# EAGLE board ESP-12E Dev Board_with_level_shifter (EAGLE 9.4.2)
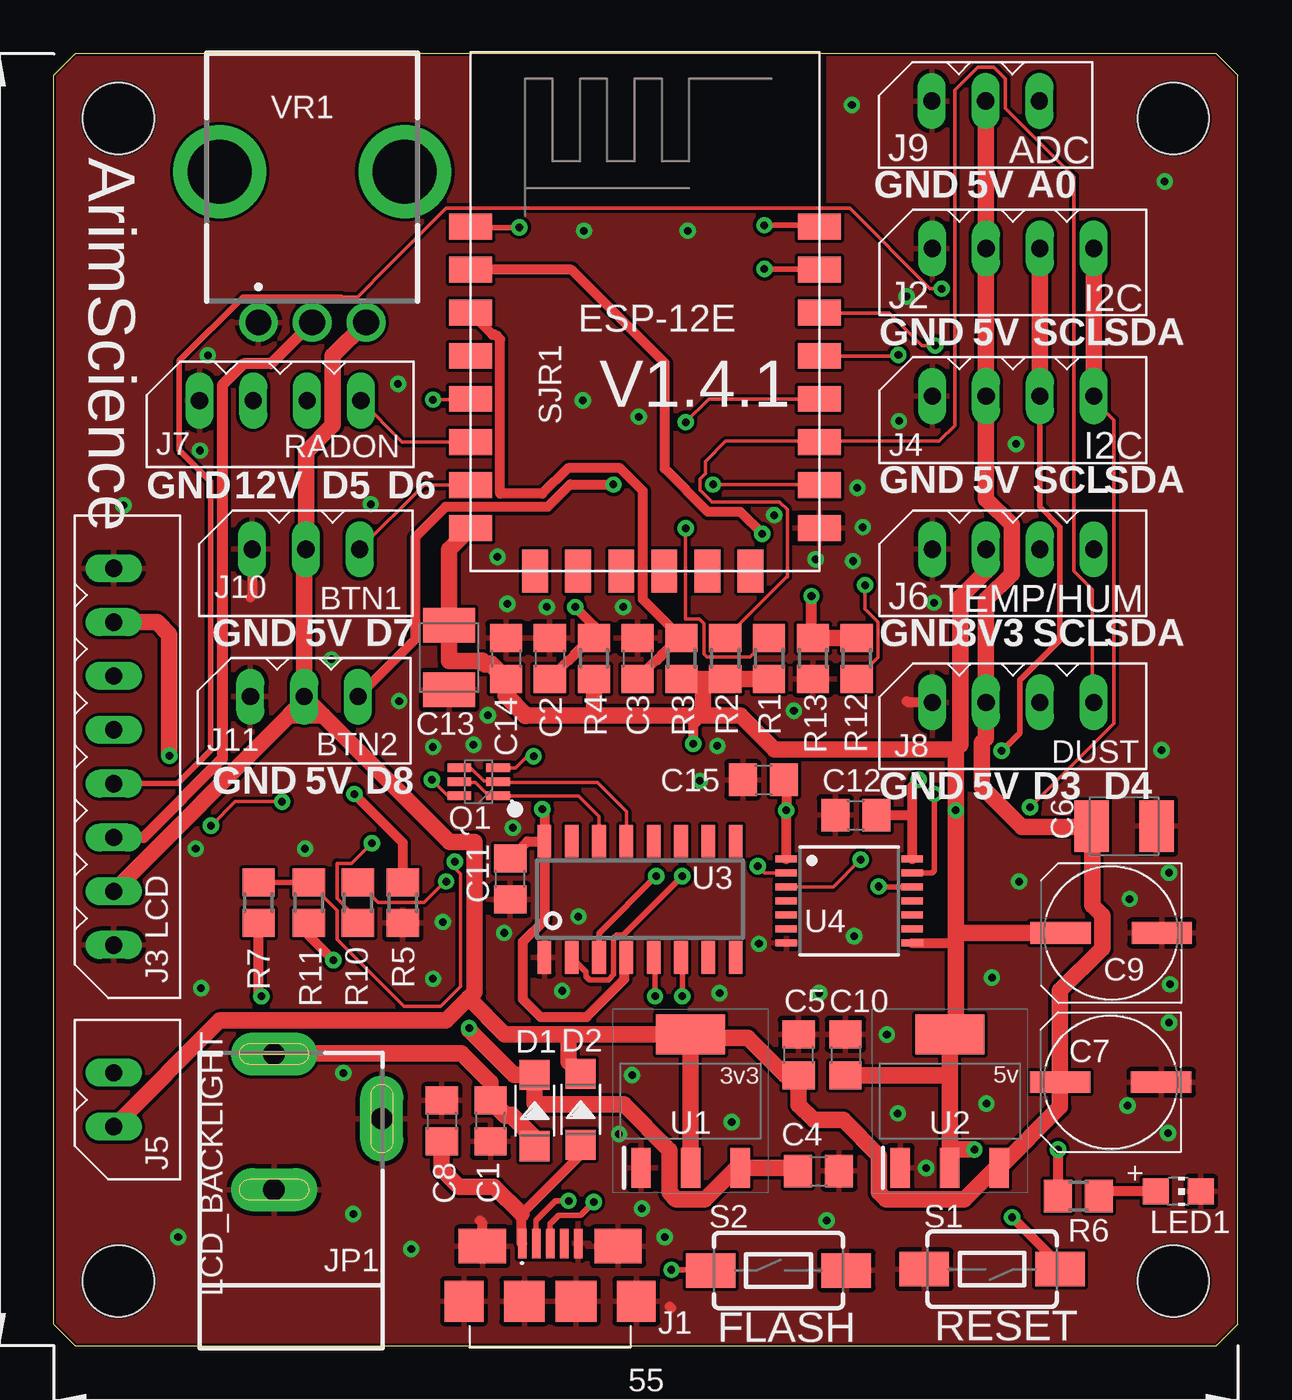
[diagram p0: board, top side]
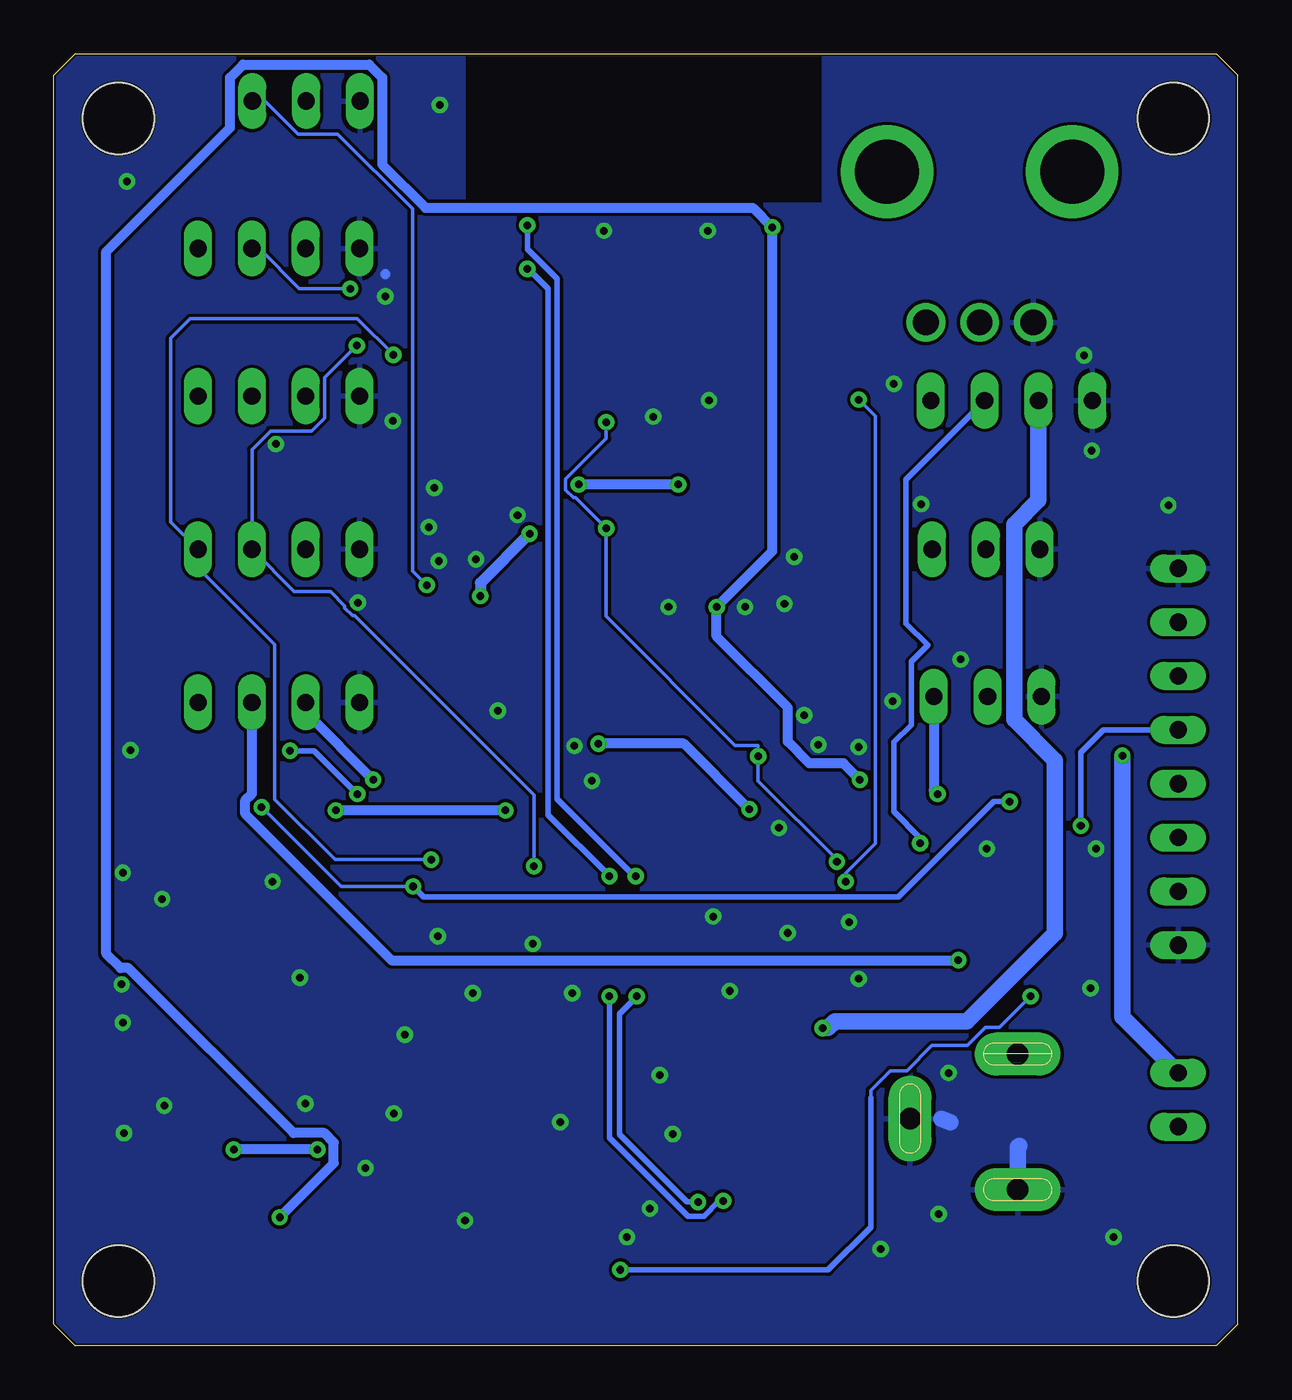
[diagram p1: board, bottom side, seen from below]

Size 55 x 60 mm. Coordinates in mm from the lower left corner, seen from the top.
Outline: 0,1 0,59 1,60 54,60 55,59 55,1 54,0 1,0 0,1
Copper layers (1*16): Top 0.035mm / dielectric 1.5mm / Bottom 0.035mm
Design rules "default *": minimum track width 6mil, minimum drill 0.35mm, track to track 6mil, track to pad 6mil, pad to pad 6mil, via to via 6mil, smd to smd 6mil, copper to edge 4mil, drill to drill 6mil, minimum pad ring 10mil, minimum via ring 8mil, stop-mask expansion 4mil, vias tented up to drill 15mil, thermal gap 8mil
Net classes: 1 power: width 0.457 mm
Holes 3.3 mm at 3,57 52,57 52,3 3,3

## Footprints (pad centres in the part's own frame; a part is rotated, then mirrored left to right if it is on the bottom)
C0805 = smd 1.3 x 1.5: 1 -0.95,0; 2 0.95,0
SMC_B = smd 1.6 x 2.4: + -1.5,0; - 1.5,0
UD-6,3X7,7_NICHICON = smd 2.8 x 1: + 2.35,0; - -2.35,0
SOD-123 = smd 1.397 x 1.397: + -1.651,0; - 1.651,0
ZX62B5PA33 = smd 0.4 x 1.35: D+ 0,1.95; D- -0.65,1.95; GND 1.3,1.95; ID 0.65,1.95; VCC -1.3,1.95 | smd 2.2 x 1.6: SHIELD_1 -3.15,1.825; SHIELD_6 3.15,1.825 | smd 1.8 x 1.9: SHIELD_2 -4,-0.725; SHIELD_5 4,-0.725 | smd 1.9 x 1.9: SHIELD_3 -1.2,-0.725; SHIELD_4 1.2,-0.725
5267-4 = drill 0.8 long: P$1 0,0; P$2 2.5,0; P$3 5,0; P$4 7.5,0
5267-8 = drill 0.8 long: P$1 0,0; P$2 2.5,0; P$3 5,0; P$4 7.5,0; P$5 10,0; P$6 12.5,0; P$7 15,0; P$8 17.5,0
5267-2 = drill 0.8 long: P$1 0,0; P$2 2.5,0
5267-3 = drill 0.8 long: P$1 0,0; P$2 2.5,0; P$3 5,0
POWER_JACK_SLOT = drill 1 pad 2 long: GND@1 2.5,1.39; GND@2 -2.5,-1.91; PWR 2.5,-4.91
CHIP-LED0805 = smd 1.2 x 1.2: A 0,-1.05; C 0,1.05
SOT65P210X100-6N = smd 1.1 x 0.4: 1 -0.9,0.65; 2 -0.9,0; 3 -0.9,-0.65; 4 0.9,-0.65; 5 0.9,0; 6 0.9,0.65
R0805 = smd 1.3 x 1.5: 1 -0.95,0; 2 0.95,0
TACTILE_SWITCH_SMD_6.0X3.5MM = smd 2.3 x 1.6: 1 -3.15,0; 2 3.15,0
ESP8266-ESP12E = smd 2 x 1.2: 1 -7.62,5.84; 2 -7.62,3.84; 3 -7.62,1.84; 4 -7.62,-0.16; 5 -7.62,-2.16; 6 -7.62,-4.16; 7 -7.62,-6.16; 8 -7.62,-8.16; 9 8.58,-8.16; 10 8.58,-6.16; 11 8.58,-4.16; 12 8.58,-2.16; 13 8.58,-0.16; 14 8.58,1.84; 15 8.58,3.84; 16 8.58,5.84 | smd 1.2 x 2: 17 -4.62,-10.16; 18 -2.62,-10.16; 19 -0.62,-10.16; 20 1.38,-10.16; 21 3.38,-10.16; 22 5.38,-10.16
SOT230P700X170-4N = smd 1.85 x 0.9: 1 -3.1,2.3; 2 -3.1,0; 3 -3.1,-2.3 | smd 1.85 x 3.2: 4 3.1,0
SOIC16 = smd 0.635 x 1.524: 1 -4.445,-2.695; 2 -3.175,-2.695; 3 -1.905,-2.695; 4 -0.635,-2.695; 5 0.635,-2.695; 6 1.905,-2.695; 7 3.175,-2.695; 8 4.445,-2.695; 9 4.445,2.695; 10 3.175,2.695; 11 1.905,2.695; 12 0.635,2.695; 13 -0.635,2.695; 14 -1.905,2.695; 15 -3.175,2.695; 16 -4.445,2.695
TSSOP14 = smd 0.305 x 0.991: 1 -1.95,-2.918; 2 -1.3,-2.918; 3 -0.65,-2.918; 4 0,-2.918; 5 0.65,-2.918; 6 1.3,-2.918; 7 1.95,-2.918; 8 1.95,2.918; 9 1.3,2.918; 10 0.65,2.918; 11 0,2.918; 12 -0.65,2.918; 13 -1.3,2.918; 14 -1.95,2.918
RK09K1130BGM = drill 1.2 pad 1.8: 1 -2.5,-12.5; 2 0,-12.5; 3 2.5,-12.5 | drill 2.97 pad 4.3: 4 4.3,-5.5; 5 -4.3,-5.5

## Placement (x,y rotation side)
C1  10uF  [C0805]  20.29,10.43 90 top
C2  100nF  [C0805]  23.03,31.92 270 top
C3  100nF  [C0805]  27.11,31.92 270 top
C4  10uF  [C0805]  35.52,8.11 0 top
C5  22uF  [C0805]  34.59,13.51 90 top
C6  100uF  [SMC_B]  49.71,24.13 0 top
C7  220uF  [UD-6,3X7,7_NICHICON]  49.08,12.23 180 top
C8  100nF  [C0805]  18.02,10.43 270 top
C9  220uF  [UD-6,3X7,7_NICHICON]  49.11,19.17 180 top
C10  22uF  [C0805]  36.77,13.51 270 top
C11  100nF  [C0805]  21.2,21.68 90 top
C12  100nF  [C0805]  37.24,24.64 0 top
C13  100uF  [SMC_B]  18.36,31.96 270 top
C14  100nF  [C0805]  21,31.91 270 top
C15  100nF  [C0805]  32.95,26.28 0 top
D1  1N5819W  [SOD-123]  22.34,10.92 90 top
D2  1N5819W  [SOD-123]  24.47,10.97 90 top
J1  ZX62-B-5PA(33)  [ZX62B5PA33]  23.05,2.79 0 top
J2  I2C  [5267-4]  40.8,50.96 0 top
J3  LCD  [5267-8]  2.78,18.6 90 top
J4  I2C  [5267-4]  40.8,44.1 0 top
J5  LCD_BACKLIGHT  [5267-2]  2.78,10.17 90 top
J6  TEMP/HUM  [5267-4]  40.8,36.99 0 top
J7  RADON  [5267-4]  6.76,43.9 0 top
J8  DUST  [5267-4]  40.8,29.88 0 top
J9  ADC  [5267-3]  40.78,57.81 0 top
J10  BTN1  [5267-3]  9.21,36.99 0 top
J11  BTN2  [5267-3]  9.13,30.15 0 top
JP1  POWER_JACKSLT  [POWER_JACK_SLOT]  12.73,8.64 180 top
LED1  green  [CHIP-LED0805]  52.23,7.16 270 top
Q1  UMH3N  [SOT65P210X100-6N]  19.73,26.19 180 top
R1  10k  [R0805]  33.22,31.92 90 top
R2  10k  [R0805]  31.19,31.92 90 top
R3  10k  [R0805]  29.15,31.92 90 top
R4  10k  [R0805]  25.09,31.92 90 top
R5  10k  [R0805]  16.21,20.57 90 top
R6  10k  [R0805]  47.59,6.95 0 top
R7  470Ω  [R0805]  9.51,20.57 270 top
R10  470Ω  [R0805]  14.13,20.57 270 top
R11  470Ω  [R0805]  11.84,20.57 270 top
R12  47k(1%)  [R0805]  37.29,31.92 270 top
R13  10k(1%)  [R0805]  35.26,31.92 90 top
S1  RST  [TACTILE_SWITCH_SMD_6.0X3.5MM]  43.58,3.56 180 top
S2  FLASH  [TACTILE_SWITCH_SMD_6.0X3.5MM]  33.65,3.49 0 top
SJR1  ESP-12E  [ESP8266-ESP12E]  26.97,46.13 0 top
U1  5V_REG  [SOT230P700X170-4N]  29.57,11.37 90 top
U2  3V3_REG  [SOT230P700X170-4N]  41.61,11.37 90 top
U3  CH340C  [SOIC16]  27.23,20.73 0 top
U4  TXS0104  [TSSOP14]  36.94,20.66 270 top
VR1  RK09K1130AAU  [RK09K1130BGM]  12,60.02 0 top

## Library data of the parts
C1-C15 = rcl; SPICEPREFIX: C
D1 D2 = Seeed-Diode; MPN: SS0520-7-F
J1 = SamacSys_Parts; DESCRIPTION: USB Connectors MICRO B RECEPT RA SMT BTTM MNT; HEIGHT: 2.8mm; MANUFACTURER_NAME: Hirose; MANUFACTURER_PART_NUMBER: ZX62-B-5PA(33); MOUSER_PART_NUMBER: 798-ZX62-B-5PA33; MOUSER_PRICE-STOCK: https://www.mouser.com/Search/Refine.aspx?Keyword=798-ZX62-B-5PA33
J2-J11 = con-molex-spox
JP1 = kanflo
LED1 = adafruit
Q1 = SamacSys_Parts; DESCRIPTION: ROHM - UMH3NFHATN - TRANS, NPN, AUTO, 4.7K/4.7K, SOT-353; HEIGHT: 1mm; MANUFACTURER_NAME: ROHM Semiconductor; MANUFACTURER_PART_NUMBER: UMH3NFHATN; MOUSER_PART_NUMBER: 755-UMH3NFHATN; MOUSER_PRICE-STOCK: https://www.mouser.com/Search/Refine.aspx?Keyword=755-UMH3NFHATN
R1-R7 R10-R13 = rcl; SPICEPREFIX: R
S1 S2 = SparkFun-Switches; PROD_ID: SWCH-00815; SF_SKU: COM-08229
SJR1 = esp12e
U1 U2 = SamacSys_Parts; DESCRIPTION: 1A 5V LDO Linear Voltage Reg SOT-223 Diodes Inc AZ1117H-5.0TRE1, Single Linear Voltage Regulator, 1A 4.9 5.1 V, 1%, 3-Pin SOT-223; HEIGHT: 1.7mm; MANUFACTURER_NAME: Diodes Inc.; MANUFACTURER_PART_NUMBER: AZ1117H-5.0TRE1; MOUSER_PART_NUMBER: 621-AZ1117H-5.0TRE1; MOUSER_PRICE-STOCK: https://www.mouser.com/Search/Refine.aspx?Keyword=621-AZ1117H-5.0TRE1
U3 = ch340g
U4 = SparkFun-IC-Comms; PROD_ID: NA-XXXXX
VR1 = SamacSys_Parts; DESCRIPTION: Audio single pot. 10K Vertical 15mm,1B Alps RK09K Series, Linear Potentiometer with a 6 mm Dia. Shaft, 10k, +/-20%, Through Hole; HEIGHT: mm; MANUFACTURER_NAME: ALPS; MANUFACTURER_PART_NUMBER: RK09K1130A6S; MOUSER_PART_NUMBER: 688-RK09K1130A6S; MOUSER_PRICE-STOCK: https://www.mouser.com/Search/Refine.aspx?Keyword=688-RK09K1130A6S

## Nets
3.3V [power]: C9.+ C10.2 C11.2 C13.+ C14.2 C15.2 J6.P$2 R1.1 R2.1 R3.1 R4.1 R6.1 SJR1.8 U2.2 U2.4 U3.4 U3.16 U4.1 U4.8
5V [power]: C5.1 C6.+ C7.+ C12.2 D2.- J2.P$2 J3.P$2 J4.P$2 J5.P$1 J8.P$2 J9.P$2 J10.P$2 J11.P$2 U1.2 U1.4 U2.3 U4.14 VR1.3
12V [power]: C4.1 D1.- J7.P$2 U1.3
ADC: R12.1 R13.2 SJR1.2
CS0_ESP: SJR1.17
D+_USB: J1.D+ U3.5
D-_USB: J1.D- U3.6
DTR: Q1.2 Q1.4 U3.13
EN: C3.2 R3.2 SJR1.3
GND [power]: C1.1 C2.1 C3.1 C4.2 C5.2 C6.- C7.- C8.1 C9.- C10.1 C11.1 C12.1 C13.- C14.1 C15.1 J1.GND J1.SHIELD_1 J1.SHIELD_2 J1.SHIELD_3 J1.SHIELD_4 J1.SHIELD_5 J1.SHIELD_6 J2.P$1 J3.P$1 J3.P$8 J4.P$1 J6.P$1 J7.P$1 J8.P$1 J9.P$1 J10.P$1 J11.P$1 JP1.GND@1 JP1.GND@2 LED1.C R5.1 R13.1 S1.2 S2.2 SJR1.9 U1.1 U2.1 U3.1 U4.7 VR1.1
GPIO0: Q1.3 R1.2 R7.1 R11.1 SJR1.12
GPIO2: J8.P$4 R2.2 SJR1.11
GPIO4: J6.P$4 SJR1.13 U4.3
GPIO5: J6.P$3 SJR1.14 U4.2
GPIO9: SJR1.19
GPIO10: SJR1.20
GPIO12: J7.P$4 SJR1.6
GPIO13: J10.P$3 SJR1.7
GPIO14: R10.1 SJR1.5
GPIO15: J11.P$3 R5.2 SJR1.10
GPIO16: SJR1.4
LED+: J3.P$7 J5.P$2
MISO_ESP: SJR1.18
MOSI_ESP: SJR1.21
N$2: J3.P$3 VR1.2
N$3: C1.2 D1.+ JP1.PWR
N$4: LED1.A R6.2
N$5: J9.P$3 R12.2
N$6: J7.P$3 R10.2
N$9: J8.P$3 R11.2
N$10 [power]: C8.2 D2.+ J1.VCC
POWER1: R7.2 S2.1
RST: C2.2 Q1.6 R4.2 S1.1 SJR1.1
RTS: Q1.1 Q1.5 U3.14
RXD: SJR1.15 U3.2
SCL_5V: J2.P$3 J3.P$4 J4.P$3 U4.13
SCLK_ESP: SJR1.22
SDA_5V: J2.P$4 J3.P$5 J4.P$4 U4.12
TXD: SJR1.16 U3.3

## Tracks (layer width: path | path; a pad name or v marks a point on that pad's centre or on a via)
3.3V  (via drill 0.35)
  Top 0.457: U4.1 v34.02,24.86 | v34.02,24.86 | U4.8 41.85,18.7 41.89,18.66 | v29.7,27.96 29.7,28.82 30.16,29.28 | C11.2 22,23.43 U3.16 | v22.69,24.91 22.78,24.82 U3.16 | U3.4 26.5,17.95 26.5,17.03 24.75,15.27 22.61,15.27 21.78,16.1 21.78,18.76 22.78,19.76 U3.16 | C15.2 34.02,26.16 v34.02,24.86 | v46.64,9.11 R6.1
  Top 0.762: R3.1 30.16,30.97 | 30.16,30.97 R2.1 R1.1 | J6.P$2 43.3,35.95 42.11,34.76 42.11,27.91 41.89,27.69 | v42.76,9.11 41.61,9.11 U2.2 41.61,12.62 | 41.89,27.69 v41.89,24.86 41.89,19.17 | SJR1.8 18.36,36.98 C13.+ 18.36,31.8 18.37,31.79 19.86,31.79 | 30.16,29.28 31.89,29.28 33.48,27.69 41.89,27.69 | 30.16,30.97 30.16,29.28 | 41.89,19.17 41.89,18.66 41.89,14.75 U2.4 41.61,12.62 | C9.+ 41.89,19.17 | C10.2 41.56,12.56 41.61,12.62 | 30.16,29.28 25.08,29.28 | 25.08,29.28 21.92,29.28 | 25.08,29.28 R4.1
  Top 0.813: 21.92,29.28 21,30.2 C14.2 20.31,31.65 20.02,31.65 19.88,31.79 19.86,31.79
  Bottom 0.457: v34.02,24.86 v41.89,24.86 | v22.69,24.91 25.74,27.96 v29.7,27.96 | v42.76,9.11 v46.64,9.11
5V  (via drill 0.35)
  Top 0.457: 39.86,24.66 39.86,25.98 v40.17,26.28 | 39.86,24.66 39.86,22.65 U4.14 | C12.2 38.21,24.66 39.86,24.66
  Top 0.762: J9.P$2 43.28,50.98 J2.P$2 J4.P$2 43.3,39.32 44.49,38.14 44.49,35.84 43.3,34.66 J8.P$2 43.3,28.19 43.12,28.01 43.12,25.96 44.97,24.1 48.18,24.1 C6.+ 48.24,24.09 48.24,20.44 48.69,19.99 48.69,18.45 46.73,16.49 C7.+ 46.73,11.09 U2.3 43.74,8.27 42.28,6.81 38.64,6.81 38.33,7.12 38.33,8.82 36.67,10.48 35.3,10.48 34.59,11.2 C5.1 33.98,12.56 32.24,14.3 29.74,14.3 U1.4 | J11.P$2 11.63,36.91 J10.P$2 11.71,41.51 12.95,42.75 12.95,45.98 VR1.3 | J3.P$2 10.94,29.26 | 10.94,29.26 11.63,29.95 J11.P$2 | J11.P$2 12.51,29.26 | 12.51,29.26 18.38,23.4 19.54,23.4 19.54,16.42 19.27,16.14 | 12.51,29.26 10.94,29.26 | 19.27,16.14 18.23,15.11 7.71,15.11 J5.P$1 | 19.27,16.14 20.94,14.47 23.91,14.47 | U1.4 23.91,14.47 | U1.2 U1.4 | D2.- 23.91,13.18 23.91,14.47
  Bottom 0.457: v40.17,26.28 43.29,29.41 43.29,29.81 J8.P$2
12V  (via drill 0.35)
  Top 0.762: v19.29,14.75 19.29,14.66 21.37,12.57 D1.- 22.34,11.25 22.38,11.2 26.47,11.2 28.59,9.08 28.59,7.12 28.9,6.81 30.25,6.81 31.7,8.27 U1.3 34.42,8.27 C4.1
  Bottom 0.762: v19.29,14.75 19.03,14.75 18.73,15.06 12.58,15.06 8.5,19.14 8.5,27.19 10.39,29.08 10.39,38.14 9.26,39.27 J7.P$2
ADC  (via drill 0.35)
  Top 0.457: v32.9,37.71 31.89,38.73 30.38,38.73 28.38,40.73 28.38,45.64 24.04,49.97 SJR1.2
  Top 0.508: R13.2 35.19,32.94 v35.19,34.82
  Top 0.762: R12.1 R13.2
  Bottom 0.508: v32.9,37.71 35.19,35.43 v35.19,34.82
D+_USB  (via drill 0.35)
  Top 0.254: v27.92,16.22 27.92,17.98 U3.5 | v25.08,6.67 24.47,6.06 23.45,6.06 23.05,5.67 J1.D+
  Bottom 0.254: v25.08,6.67 25.59,6.67 28.74,9.82 28.74,15.41 v27.92,16.22
D-_USB  (via drill 0.35)
  Top 0.254: v29.19,16.22 29.19,17.98 U3.6 | v23.91,6.72 23.3,6.72 22.4,5.83 J1.D-
  Bottom 0.254: v29.19,16.22 29.19,9.66 25.55,6.02 24.81,6.02 24.1,6.72 v23.91,6.72
DTR
  Top 0.152: Q1.4 18.91,26.84 19.36,26.84 19.97,26.23 20.58,26.23 Q1.2 20.66,26.16 25.26,26.16 26.59,24.82 U3.13
EN
  Top 0.457: SJR1.3 20.37,46.95 20.51,46.95 20.73,46.73 20.73,39.56 22.68,39.56 23.88,40.76 26.31,40.76 27.36,39.7 27.36,34.66 R3.2 29.01,32.87 28.24,32.1 28.24,32.06 28.02,31.84 27.98,31.84 C3.2
GND  (via drill 0.35)
  Top 0.457: J8.P$1 39.67,29.88 39.61,29.94 | J1.SHIELD_2 18.98,2 | 28.62,1.81 28.69,1.75 | J1.SHIELD_1 19.9,5.7 19.8,5.81 | J10.P$1 9.21,34.85 9.13,34.77
  Bottom 0.457: 39.61,49.77 39.61,49.75
  Bottom 0.762: JP1.GND@1 10.23,9.23 10.14,9.28 | 13.77,10.55 13.36,10.38
  other vias: 16.6,4.49 24.62,51.78 29.45,51.78 24.57,43.91 27.16,43.15 30.01,26.23 30.92,16.38 6.59,23.08 11.67,23.08 5.78,5.05 15.99,44.67 14.72,39.08 43.57,17.09 51.85,16.78 44.84,21.56 51.75,9.87 26.86,12.57 31.48,10.38 27.31,6.37 37.58,38.02 40.88,34.51 6.79,41.57 34.38,29.48 20.15,29.28 19.49,27.91 30.82,27.86 13.9,6.11 17.61,17.04 3.24,39.03 6.84,16.61 37.07,57.63 44.69,41.88 51.8,15 51.8,21.96 43.32,11.25 40.52,8.25 33.46,38.58 13.45,12.67 39.61,48.74 39.25,42.94 7.15,45.99 23.61,16.48 26.25,9.82 35.9,5.81 37.12,36.44 20.61,36.65 21.07,34.46 24.37,19.93 49.97,20.75 49.87,11.14 39.2,10.79 35.54,16.38 22.89,34.31 17.61,27.81 35.39,36.52 37.32,39.85 51.6,54.07 12.89,31.87 18.07,19.68 28.38,5.05 51.44,27.65 26.45,34.31 16.04,29.94 38.69,14.45 37.17,19.02 32.75,18.66 21.32,24.05 20.91,19.17
  pour Top: -6.89,65.66 -6.89,-4.32 57.72,-4.32 57.72,65.66
  pour Bottom: -6.86,65.66 -6.86,-4.35 58.72,-4.35 58.72,65.66
GPIO0  (via drill 0.35)
  Top 0.152: v22.29,27.38 21.98,27.38 21.45,26.84 Q1.3 | v18.63,22.47 18.63,22.17 18.88,21.91 18.88,16.68 17.97,15.77 16.26,15.77 13.15,18.88 13.15,20.22 R11.1 | v29.35,42.89 30.43,43.97 SJR1.12 | R1.2 32.34,31.99 30.34,31.99 30.21,32.13 30.21,33.54 30,33.75 29.35,33.75 v29.35,37.97
  Top 0.254: R7.1 R11.1
  Bottom 0.152: v18.63,22.47 18.63,22.57 22.29,26.23 v22.29,27.38 22.29,27.88 23.35,27.88 29.35,33.88 v29.35,37.97 30.77,39.39 30.87,39.39 31.22,39.75 31.22,40.25 29.35,42.13 v29.35,42.89
GPIO2
  Top 0.152: SJR1.11 35.59,42.01 | J8.P$4 48.24,29.89 48.24,35.12 47.38,35.98 47.38,54.3 44.2,57.47 44.2,58.84 43.67,59.38 42.91,59.38 41.84,58.31 41.84,42.74 41.11,42.01 35.59,42.01 | 35.59,42.01 31.2,42.01 30.26,41.06 30.26,40.5 30.01,40.25 30.01,39.75 30.57,39.18 33.71,39.18 34.07,38.83 34.07,35.7 34.02,35.7 R2.2
GPIO4  (via drill 0.35)
  Top 0.152: v39.23,46.02 39.18,45.97 35.59,45.97 SJR1.13 | U4.3 36.2,21.3 v37.47,22.57
  Bottom 0.152: v39.23,46.02 40.9,47.7 48.68,47.7 49.56,46.81 49.56,38.26 J6.P$4 48.24,36.98 48.24,36.06 44.74,32.56 44.74,25.37 41.95,22.57 v37.47,22.57
GPIO5  (via drill 0.35)
  Top 0.152: v40.93,46.45 40.32,46.45 38.82,47.95 35.59,47.95 SJR1.14 | U4.2 33.01,21.95 v32.7,22.27
  Bottom 0.152: v40.93,46.45 42.42,44.96 42.42,43.08 43.02,42.48 44.94,42.48 45.8,41.62 J6.P$3 43.83,35.02 42.15,35.02 41.48,34.36 41.48,34.26 41.13,33.91 41.03,33.91 32.7,25.57 32.7,25.46 32.7,25.42 v32.7,22.27
GPIO12
  Top 0.152: J7.P$4 16.19,41.97 SJR1.6
GPIO13
  Top 0.152: J10.P$3 17.19,39.97 SJR1.7
GPIO14  (via drill 0.35)
  Top 0.152: v18.22,21.56 18.17,21.56 17.2,20.59 15.06,20.59 R10.1 | v17.61,43.94 19.31,43.94 SJR1.5
  Bottom 0.152: v18.22,21.56 18.22,21.96 16.85,23.34 16.85,43.17 v17.61,43.94
GPIO15  (via drill 0.35)
  Top 0.152: v30.62,40 35.53,40 SJR1.10
  Top 0.457: v25.99,40 23.98,40 22.94,38.95 18.19,38.95 16.78,37.54 16.78,32.8 J11.P$3 | v13.95,25.62 16.21,23.37 R5.2
  Bottom 0.457: v25.99,40 v30.62,40 | J11.P$3 14.13,25.8 v13.95,25.62
LED+  (via drill 0.35)
  Top 0.762: v5.37,27.4 5.37,33.04 4.8,33.6 J3.P$7
  Bottom 0.762: J5.P$2 5.37,15.27 v5.37,27.4
N$2
  Top 0.508: VR1.2 10.09,45.61 8.82,45.61 7.82,44.61 7.82,27.26 4.16,23.6 J3.P$3
N$3
  Top 0.762: C1.2 20.29,12.23 18.93,13.58 10.27,13.58 JP1.PWR
  Top 0.813: C1.2 20.98,10.69 21.27,10.69 22.34,9.62 D1.+
N$4
  Top 0.457: LED1.A 48.75,7.16 R6.2
N$5  (via drill 0.35)
  Top 0.152: v37.68,35.33 37.68,34.21 38.27,33.62 38.27,31.95 R12.2
  Bottom 0.152: v37.68,35.33 38.34,35.98 38.34,52.8 41.81,56.27 43.65,56.27 45.18,57.81 J9.P$3
N$6  (via drill 0.35)
  Top 0.152: R10.2 14.13,19.8 13.15,20.78 13.15,22.4 13.83,22.4 v14.77,23.34
  Bottom 0.254: J7.P$3 15.43,40.23 15.43,33.55 14.41,32.53 15.17,31.77 15.17,28.84 15.98,28.03 15.98,24.81 14.77,23.59 v14.77,23.34
N$9  (via drill 0.35)
  Top 0.457: v12.99,17.9 11.84,19.05 R11.2
  Bottom 0.457: J8.P$3 45.8,25.63 46.11,25.33 46.11,24.7 39.31,17.9 v12.99,17.9
N$10
  Top 0.457: J1.VCC 21.72,4.78 21.72,6.11 24.47,8.87 D2.+
  Top 0.762: 21.72,6.11 20.45,7.38 18.83,7.38 18.02,8.2 C8.2
POWER1  (via drill 0.35)
  Top 0.254: v28.69,3.52 30.47,3.52 S2.1
  Top 0.457: v9.64,16.22 9.51,16.35 R7.2
  Bottom 0.152: 17.05,11.5 17.05,11.87 16.15,12.78 15.37,12.78 14.21,13.94 12.58,13.94 11.74,14.78 11.09,14.78 v9.64,16.22
  Bottom 0.254: 17.05,11.5 17.05,5.5 19.03,3.52 v28.69,3.52
RST  (via drill 0.35)
  Top 0.152: v17.56,26.28 18.3,25.54 Q1.6
  Top 0.254: v21.62,51.94 19.39,51.94 SJR1.1
  Top 0.457: C2.2 23.9,31.84 23.94,31.84 24.17,32.06 24.17,32.1 24.94,32.87 R4.2 25.09,33.43 v24.22,34.31 | v44.51,5.96 46.73,3.75 S1.1
  Bottom 0.457: v44.51,5.96 42,8.48 42,9.43 42.44,9.87 43.87,9.87 51.54,17.54 51.9,17.54 52.56,18.2 52.56,50.82 46.81,56.57 46.81,58.89 46.21,59.5 40.35,59.5 39.74,58.89 39.74,54.85 37.74,52.85 22.54,52.85 v21.62,51.94 21.62,36.9 v24.22,34.31 24.22,32.94 20.91,29.63 20.91,28.05 19.91,27.05 18.33,27.05 v17.56,26.28
RTS
  Top 0.152: Q1.5 18.91,26.16 19.59,26.16 20.2,25.55 20.58,25.55 Q1.1 24.37,25.54 25.32,24.59 U3.14
RXD  (via drill 0.35)
  Top 0.254: v33,50.01 35.52,50.01 SJR1.15 | v29.19,21.81 26.46,19.08 26.16,19.08 25.99,18.92 25.99,17.24 25.75,17 24.89,17 24.72,17.16 24.72,17.37 U3.2
  Bottom 0.152: 32.95,50.01 v33,50.01
  Bottom 0.254: 32.95,50.01 32.04,49.09 32.04,24.66 v29.19,21.81
SCL_5V  (via drill 0.35)
  Top 0.152: 3.03,26.1 J3.P$4 | v41.23,49.09 40.7,49.09 36.97,52.83 18.22,52.83 15.53,50.13 14.11,48.71 13.34,48.71
  Top 0.254: v44.03,27.63 44.87,28.47 44.87,30.92 46.73,32.78 46.73,38.03 45.8,38.96 J4.P$3 | 3.03,26.1 5.75,26.1 7.29,27.65 7.29,40.14 5.83,41.6 5.83,45.74 8.8,48.71 13.34,48.71 | U4.13 40.78,21.95 40.9,22.08 v40.9,25.62
  Top 0.762: J2.P$3 J4.P$3
  Bottom 0.152: v41.23,49.09 43.6,49.09 45.42,50.92 45.73,50.92 J2.P$3
  Bottom 0.254: v40.9,25.62 42.91,27.63 v44.03,27.63
SDA_5V  (via drill 0.35)
  Top 0.152: v45.35,25.01 49.23,28.9 49.23,43 48.47,43.76 J4.P$4 | v7.3,24.15 8.42,25.27 v10.6,25.27
  Top 0.254: U4.12 38.34,21.3 v38.31,21.33
  Top 0.762: J4.P$4 J2.P$4
  Bottom 0.152: v45.35,25.01 41.66,21.33 v38.31,21.33
  Bottom 0.254: v38.31,21.33 37.83,20.85 15.76,20.85 11.35,25.27 v10.6,25.27 | J3.P$5 6.25,28.6 7.3,27.55 v7.3,24.15
TXD  (via drill 0.35)
  Top 0.254: v33,52.04 35.49,52.04 SJR1.16 | U3.3 25.32,19.16 v27.98,21.81
  Bottom 0.254: v33,52.04 33,50.94 31.63,49.56 31.63,25.4 28.04,21.81 v27.98,21.81

## Text on the board
tPlace: ArimScience | GND | 5V | A0 | GND | 5V | SCL | SDA | V1.4.1 | GND | 5V | SCL | SDA | GND | 12V | D5 | D6 | GND | 5V | D7 | GND | 3V3 | SCL | SDA | GND | 5V | D8 | GND | 5V | D3 | D4 | 3v3 | 5v | FLASH | RESET